# Allegro board PWR_REV00_150306.brd
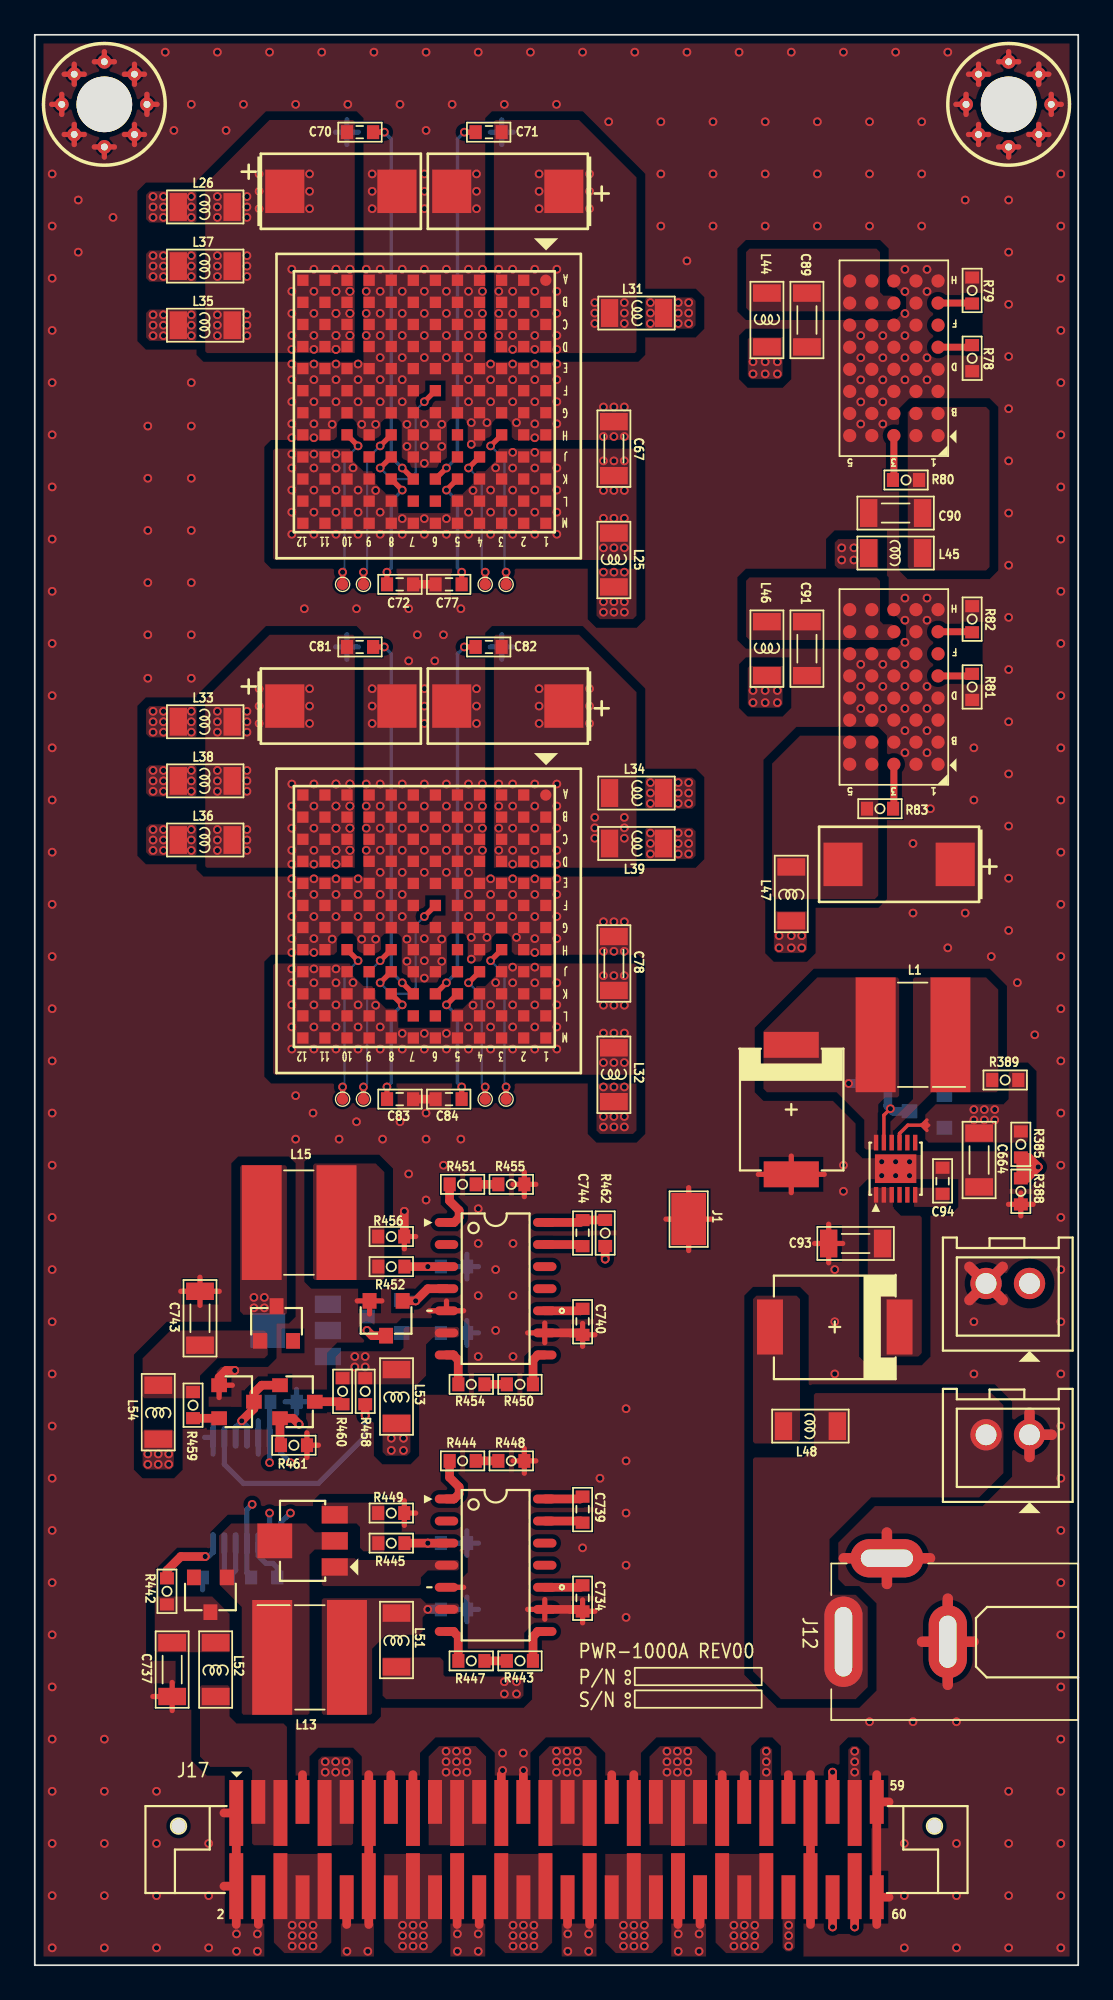
[diagram p0: board, top side]
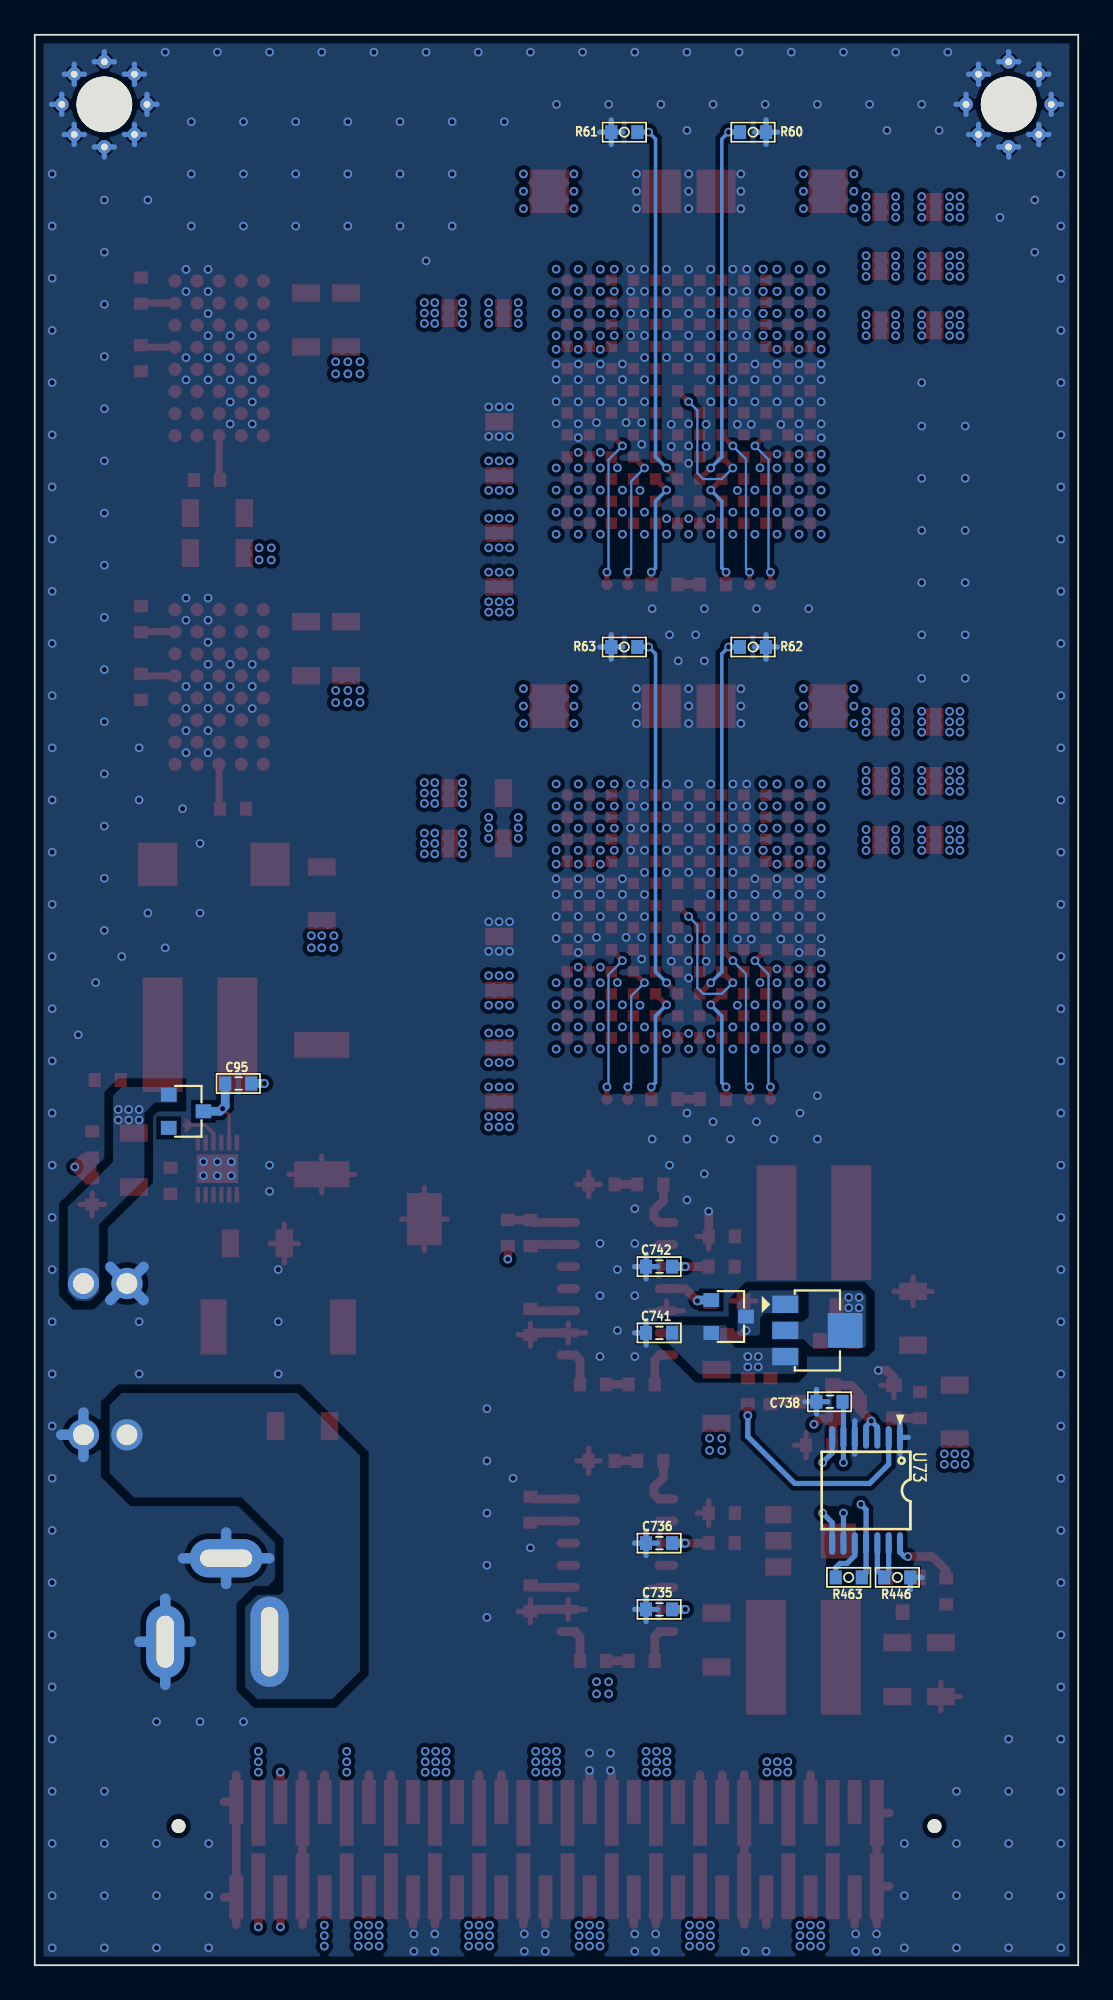
[diagram p1: board, bottom side, seen from below]

Outline 60 x 111 mm; copper layers: TOP, 2-GND, 3-IN, 4-IN, 5-PWR, 6-IN, 7-PWR, 8-IN, 9-IN, 10-PWR, 11-IN, 12-IN, 13-GND, BOTTOM. Coordinates in mm from the lower left corner of the outline.
Outline path: 0,111 0,0 60,0 60,111 0,111

## Placement (name value [footprint] x y rotation side)
C67  10u_1206  [C1206]  33.3 87.2 90 top
C68  47u_Tant_D_6.3V  [TC7343D]  17.6 102 180 top
C69  47u_Tant_D_6.3V  [TC7343D]  27.2 102 0 top
C70  22p_0603  [C0603]  18.7 105.4 0 top
C71  22p_0603  [C0603]  26.1 105.4 180 top
C72  0.1u_0603  [C0603]  21 79.4 0 top
C77  0.1u_0603  [C0603]  23.8 79.4 180 top
C78  10u_1206  [C1206]  33.3 57.6 90 top
C79  47u_Tant_D_6.3V  [TC7343D]  17.6 72.4 180 top
C80  47u_Tant_D_6.3V  [TC7343D]  27.2 72.4 0 top
C81  22p_0603  [C0603]  18.7 75.8 0 top
C82  22p_0603  [C0603]  26.1 75.8 180 top
C83  0.1u_0603  [C0603]  21 49.8 0 top
C84  0.1u_0603  [C0603]  23.8 49.8 180 top
C89  10u_1206  [C1206]  44.4 94.6 270 top
C90  10u_1206  [C1206]  49.5 83.5 180 top
C91  10u_1206  [C1206]  44.4 75.7 270 top
C92  47u_Tant_D_6.3V  [TC7343D]  49.7 63.3 0 top
C93  10u_1206  [C1206]  47.2 41.5 180 top
C94  0.68u_0603  [C0603]  52.2 45.1 90 top
C95  1u_0603  [C0603]  48.3 50.7 0 bottom
C664  10u_1206  [C1206]  54.3 46.3 90 top
C734  0.1u_0603  [C0603]  31.5 21.1 270 top
C735  10u_1206  [C0603]  24.1 20.46 0 bottom
C736  470p_0603  [C0603]  24.1 24.27 0 bottom
C737  2.2u_1206_100V  [C1206]  7.9 17 270 top
C738  0.1u_0603  [C0603]  14.3 32.4 0 bottom
C739  1n_0603  [C0603]  31.5 26.2 270 top
C740  0.1u_0603  [C0603]  31.5 37 270 top
C741  10u_1206  [C0603]  24.1 36.36 0 bottom
C742  470p_0603  [C0603]  24.1 40.17 0 bottom
C743  2.2u_1206_100V  [C1206]  9.5 37.2 90 top
C744  1n_0603  [C0603]  31.5 42.1 270 top
CN2  35312-0260  [SD-35312-2P]  57.2 30.5 270 top
D3  CMSH3-40MA  [SMC]  46 36.7 180 top
D4  CMPSH1-4  [SOT-23]  51.3 49.1 270 bottom
D5  CMSH3-40MA  [SMC]  43.5 49.2 270 top
J1  GND(MOLD)  [TP_3020]  37.6 42.9 270 top
J12  -  [DC-005]  52.5 18.6 270 top
J13  35312-0260  [SD-35312-2P]  57.2 39.2 270 top
J17  FX4B2-60P-1.27SV(Receptacle)  [FX4B2-60S-1_27SV]  30 6.65 180 top
L1  LPS6225-103MR  [IND_LPS6225]  50.5 53.5 0 top
L13  LPS6225-104ML  [IND_LPS6225]  15.8 17.7 180 top
L15  LPS6225-104ML  [IND_LPS6225]  15.2 42.7 0 top
L25  BLM31PG121SN1  [L1206]  33.3 80.8 270 top
L26  BLM31PG121SN1  [L1206]  9.8 101.1 0 top
L31  BLM31PG121SN1  [L1206]  34.6 95 180 top
L32  BLM31PG121SN1  [L1206]  33.3 51.2 270 top
L33  BLM31PG121SN1  [L1206]  9.8 71.5 0 top
L34  BLM31PG121SN1  [L1206]  34.6 67.4 180 top
L35  BLM31PG121SN1  [L1206]  9.8 94.3 0 top
L36  BLM31PG121SN1  [L1206]  9.8 64.7 0 top
L37  BLM31PG121SN1  [L1206]  9.8 97.7 0 top
L38  BLM31PG121SN1  [L1206]  9.8 68.1 0 top
L39  BLM31PG121SN1  [L1206]  34.6 64.5 180 top
L44  BLM31PG121SN1  [L1206]  42.1 94.6 270 top
L45  BLM31PG121SN1  [L1206]  49.5 81.2 0 top
L46  BLM31PG121SN1  [L1206]  42.1 75.7 270 top
L47  BLM31PG121SN1  [L1206]  43.5 61.6 90 top
L48  BLM31PG121SN1  [L1206]  44.6 31 0 top
L51  BLM31PG121SN1  [L1206]  20.8 18.7 90 top
L52  BLM31PG121SN1  [L1206]  10.4 17 90 top
L53  BLM31PG121SN1  [L1206]  20.8 32.7 90 top
L54  BLM31PG121SN1  [L1206]  7.1 31.8 90 top
M1  TP2104K1  [SOT-23]  20.1 37.3 270 bottom
M2  TN2106  [SOT-23]  20.2 37.2 180 top
MH1  HOLE_MOUNT  [SCREW-3_2-NPTH]  4 107 0 top
MH2  HOLE_MOUNT  [SCREW-3_2-NPTH]  56 107 0 top
NOREF  -  []  11.59 8.76 0 top
NOREF#2  -  []  6.37 9.15 0 top
NOREF#3  -  []  47.15 8.76 0 top
NOREF#4  -  []  30 6.65 90 top
NOREF#5  -  []  0 0 90 top
NOREF#6  -  []  48.78 6.44 90 top
NOREF#7  -  []  0 111 0 top
NOREF#8  -  []  48.76 2.65 90 top
NOREF#9  -  []  0 111 0 top
NOREF#10  -  []  6.37 4.15 90 top
NOREF#11  -  []  4 107 90 top
NOREF#12  -  []  56 107 0 top
NOREF#13  -  []  47.51 5.17 90 top
NOREF#14  -  []  8.27 8 0 top
Q1  FMMT494  [SOT-23]  11.6 32.4 270 top
Q2  FMMT551  [SOT-23]  15.1 32.4 270 top
R60  20k_0603  [R0603]  18.7 105.4 180 bottom
R61  43k_0603  [R0603]  26.1 105.4 0 bottom
R62  47k_0603  [R0603]  18.7 75.8 0 bottom
R63  120k_0603  [R0603]  26.1 75.8 0 bottom
R78  0_0603  [R0603]  53.9 92.4 90 top
R79  130k_0603  [R0603]  53.9 96.3 270 top
R80  130k_0603  [R0603]  50.1 85.4 180 top
R81  0_0603  [R0603]  53.9 73.5 90 top
R82  130k_0603  [R0603]  53.9 77.4 270 top
R83  39k_0603  [R0603]  48.6 66.5 0 top
R385  100k_0603  [R0603]  56.7 47.2 270 top
R388  20k_0603  [R0603]  56.7 44.5 270 top
R389  LRC-LR1206-01-R050-F  [R0603]  55.8 50.9 0 top
R442  240k_0603  [R0603]  7.6 21.5 270 top
R443  150k_0603  [R0603]  27.9 17.5 180 top
R444  360k_0603  [R0603]  24.6 29 0 top
R445  1k_0603  [R0603]  20.5 24.27 0 top
R446  15k_0603  [R0603]  10.4 22.3 0 bottom
R447  3.9k_0603  [R0603]  25.1 17.5 0 top
R448  24k_0603  [R0603]  27.4 29 0 top
R449  2.2_0603  [R0603]  20.5 26 180 top
R450  150k_0603  [R0603]  27.9 33.4 180 top
R451  360k_0603  [R0603]  24.6 44.9 0 top
R452  1k_0603  [R0603]  20.5 40.17 0 top
R454  3.9k_0603  [R0603]  25.1 33.4 0 top
R455  24k_0603  [R0603]  27.4 44.9 0 top
R456  2.2_0603  [R0603]  20.5 41.9 180 top
R458  5.1k_0603  [R0603]  19 33 90 top
R459  240k_0603  [R0603]  9.1 32.2 90 top
R460  15k_0603  [R0603]  17.7 33 90 top
R461  15k_0603  [R0603]  14.9 29.9 0 top
R462  10k_0603  [R0603]  32.8 42.1 90 top
R463  1k_0603  [R0603]  13.2 22.3 180 bottom
TP1  TEST POINT  [TP0_65]  17.7 79.4 180 top
TP2  TEST POINT  [TP0_65]  27.1 79.4 180 top
TP3  TEST POINT  [TP0_65]  25.9 79.4 180 top
TP4  TEST POINT  [TP0_65]  18.9 79.4 180 top
TP5  TEST POINT  [TP0_65]  27.1 49.8 180 top
TP6  TEST POINT  [TP0_65]  17.7 49.8 180 top
TP7  TEST POINT  [TP0_65]  25.9 49.8 180 top
TP8  TEST POINT  [TP0_65]  18.9 49.8 180 top
U14  LTM4619EV#PBF  [LGA144_W15X15_P1_27]  22.4 89.9 180 top
U15  LTM4619EV#PBF  [LGA144_W15X15_P1_27]  22.4 60.3 180 top
U18  LTM8045EY#PBF  [BGA40_P1_27_W11_25X6_25]  49.4 92.4 180 top
U19  LTM8045EY#PBF  [BGA40_P1_27_W11_25X6_25]  49.4 73.5 180 top
U20  LT3650EDD-8.2#PBF  [DFN12_3X3_EXP2_38X1_65]  49.5 45.8 0 top
U57  TN2510N8  [TO-243AA-4P]  15.4 24.4 90 top
U58  MMBD914LT1G  [SOT-23]  10.1 21.3 180 top
U59  TP2510N8  [TO-243AA-4P]  15 36.5 270 bottom
U60  MMBD914LT1G  [SOT-23]  13.9 36.9 0 top
U72  HV9110NG  [SOIC14_P1-27_W6_0X8_65]  26.5 23 0 top
U73  AD5207BRU100  [TSSOP14_P0_65_W5_1X6_6]  12.2 27.3 0 bottom
U74  HV9110NG  [SOIC14_P1-27_W6_0X8_65]  26.5 38.9 0 top

## Library data of the parts
C67 C70-C72 C77 C78 C81-C84 C89-C91 C93-C95 C664 C734-C744 = CAP NP
C68 C69 C79 C80 C92 = C
CN2 = CON2
D3 D5 = MMBZ5243BL_0
D4 = CMPSH1-4
J1 = CON1_0
J12 = DC-005_0
J13 = CON10_1
J17 = CONN PCB 30x2
L1 L13 L15 = INDUCTOR
L25 L26 L31-L39 L44-L48 L51-L54 = BEAD FERRITE
M1 = TP2104_0
M2 = TN2106
MH1 MH2 = MOUNT HOLE
Q1 = MMBT3904_0
Q2 = Q2SA1013_0
R60-R63 R78-R83 R385 R388 R389 R442-R452 R454-R456 R458-R463 = R
TP1-TP8 = TEST POINT
U14 U15 = SN75240_70
U18 U19 = SN75240_67
U20 = SN75240_80
U57 U59 = 7414_87
U58 U60 = 7414_88
U72 = SN75240_63
U73 = SN75240_81
U74 = SN75240_65

## Footprints (pads in the part's own frame, mm; a bottom-side part is the same pattern mirrored in y, then rotated)
BGA40_P1_27_W11_25X6_25
  round 0.76 smd: A1(-2.54,4.445) A2(-1.27,4.445) A3(0,4.445) A4(1.27,4.445) A5(2.54,4.445) B1(-2.54,3.175) B2(-1.27,3.175) B3(0,3.175) B4(1.27,3.175) B5(2.54,3.175) C1(-2.54,1.905) C2(-1.27,1.905) C3(0,1.905) C4(1.27,1.905) C5(2.54,1.905) D1(-2.54,0.635) D2(-1.27,0.635) D3(0,0.635) D4(1.27,0.635) D5(2.54,0.635) E1(-2.54,-0.635) E2(-1.27,-0.635) E3(0,-0.635) E4(1.27,-0.635) E5(2.54,-0.635) F1(-2.54,-1.905) F2(-1.27,-1.905) F3(0,-1.905) F4(1.27,-1.905) F5(2.54,-1.905) G1(-2.54,-3.175) G2(-1.27,-3.175) G3(0,-3.175) G4(1.27,-3.175) G5(2.54,-3.175) H1(-2.54,-4.445) H2(-1.27,-4.445) H3(0,-4.445) H4(1.27,-4.445) H5(2.54,-4.445)
C0603
  rect 0.7x0.8 smd: 1(-0.75,0) 2(0.75,0)
C1206
  rect 1x1.6 smd: 1(-1.55,0) 2(1.55,0)
DC-005
  oval 2.2x4.2 hole 1x3: 2(-4.8,-3.5)
  oval 4.2x2.2 hole 3x1: 3(0,0)
  oval 5.2x2.2 hole 4x1: 4(0,-6)
DFN12_3X3_EXP2_38X1_65
  rect 0.25x0.9 smd: 1(-1.125,-1.5) 2(-0.675,-1.5) 3(-0.225,-1.5) 4(0.225,-1.5) 5(0.675,-1.5) 6(1.125,-1.5) 7(1.125,1.5) 8(0.675,1.5) 9(0.225,1.5) 10(-0.225,1.5) 11(-0.675,1.5) 12(-1.125,1.5)
  rect 2.38x1.65 smd: 13(0,0)
FX4B2-60S-1_27SV
  round 0.8 hole 0.8 unplated: (-21.735,-1.35) (21.735,-1.35)
  rect 0.8x3.79 smd: 1(18.415,-2.105) 2(18.415,2.105) 5(15.875,-2.105) 6(15.875,2.105) 9(13.335,-2.105) 10(13.335,2.105) 13(10.795,-2.105) 14(10.795,2.105) 17(8.255,-2.105) 18(8.255,2.105) 21(5.715,-2.105) 22(5.715,2.105) 25(3.175,-2.105) 26(3.175,2.105) 29(0.635,-2.105) 30(0.635,2.105) 33(-1.905,-2.105) 34(-1.905,2.105) 37(-4.445,-2.105) 38(-4.445,2.105) 41(-6.985,-2.105) 42(-6.985,2.105) 45(-9.525,-2.105) 46(-9.525,2.105) 49(-12.065,-2.105) 50(-12.065,2.105) 53(-14.605,-2.105) 54(-14.605,2.105) 57(-17.145,-2.105) 58(-17.145,2.105)
  rect 0.8x2.52 smd: 3(17.145,-2.74) 4(17.145,2.74) 7(14.605,-2.74) 8(14.605,2.74) 11(12.065,-2.74) 12(12.065,2.74) 15(9.525,-2.74) 16(9.525,2.74) 19(6.985,-2.74) 20(6.985,2.74) 23(4.445,-2.74) 24(4.445,2.74) 27(1.905,-2.74) 28(1.905,2.74) 31(-0.635,-2.74) 32(-0.635,2.74) 35(-3.175,-2.74) 36(-3.175,2.74) 39(-5.715,-2.74) 40(-5.715,2.74) 43(-8.255,-2.74) 44(-8.255,2.74) 47(-10.795,-2.74) 48(-10.795,2.74) 51(-13.335,-2.74) 52(-13.335,2.74) 55(-15.875,-2.74) 56(-15.875,2.74) 59(-18.415,-2.74) 60(-18.415,2.74)
IND_LPS6225
  rect 2.3x6.6 smd: 1(-2.15,0) 2(2.15,0)
L1206
  rect 1x1.6 smd: 1(-1.55,0) 2(1.55,0)
LGA144_W15X15_P1_27
  round 0.65 smd: A1(-6.985,-6.985)
  rect 0.65x0.65 smd: A2(-5.715,-6.985) A3(-4.445,-6.985) A4(-3.175,-6.985) A5(-1.905,-6.985) A6(-0.635,-6.985) A7(0.635,-6.985) A8(1.905,-6.985) A9(3.175,-6.985) A10(4.445,-6.985) A11(5.715,-6.985) A12(6.985,-6.985) B1(-6.985,-5.715) B2(-5.715,-5.715) B3(-4.445,-5.715) B4(-3.175,-5.715) B5(-1.905,-5.715) B6(-0.635,-5.715) B7(0.635,-5.715) B8(1.905,-5.715) B9(3.175,-5.715) B10(4.445,-5.715) B11(5.715,-5.715) B12(6.985,-5.715) C1(-6.985,-4.445) C2(-5.715,-4.445) C3(-4.445,-4.445) C4(-3.175,-4.445) C5(-1.905,-4.445) C6(-0.635,-4.445) C7(0.635,-4.445) C8(1.905,-4.445) C9(3.175,-4.445) C10(4.445,-4.445) C11(5.715,-4.445) C12(6.985,-4.445) D1(-6.985,-3.175) D2(-5.715,-3.175) D3(-4.445,-3.175) D4(-3.175,-3.175) D5(-1.905,-3.175) D6(-0.635,-3.175) D7(0.635,-3.175) D8(1.905,-3.175) D9(3.175,-3.175) D10(4.445,-3.175) D11(5.715,-3.175) D12(6.985,-3.175) E1(-6.985,-1.905) E2(-5.715,-1.905) E3(-4.445,-1.905) E4(-3.175,-1.905) E5(-1.905,-1.905) E6(-0.635,-1.905) E7(0.635,-1.905) E8(1.905,-1.905) E9(3.175,-1.905) E10(4.445,-1.905) E11(5.715,-1.905) E12(6.985,-1.905) F1(-6.985,-0.635) F2(-5.715,-0.635) F3(-4.445,-0.635) F4(-3.175,-0.635) F5(-1.905,-0.635) F6(-0.635,-0.635) F7(0.635,-0.635) F8(1.905,-0.635) F9(3.175,-0.635) F10(4.445,-0.635) F11(5.715,-0.635) F12(6.985,-0.635) G1(-6.985,0.635) G2(-5.715,0.635) G3(-4.445,0.635) G4(-3.175,0.635) G5(-1.905,0.635) G6(-0.635,0.635) G7(0.635,0.635) G8(1.905,0.635) G9(3.175,0.635) G10(4.445,0.635) G11(5.715,0.635) G12(6.985,0.635) H1(-6.985,1.905) H2(-5.715,1.905) H3(-4.445,1.905) H4(-3.175,1.905) H5(-1.905,1.905) H6(-0.635,1.905) H7(0.635,1.905) H8(1.905,1.905) H9(3.175,1.905) H10(4.445,1.905) H11(5.715,1.905) H12(6.985,1.905) J1(-6.985,3.175) J2(-5.715,3.175) J3(-4.445,3.175) J4(-3.175,3.175) J5(-1.905,3.175) J6(-0.635,3.175) J7(0.635,3.175) J8(1.905,3.175) J9(3.175,3.175) J10(4.445,3.175) J11(5.715,3.175) J12(6.985,3.175) K1(-6.985,4.445) K2(-5.715,4.445) K3(-4.445,4.445) K4(-3.175,4.445) K5(-1.905,4.445) K6(-0.635,4.445) K7(0.635,4.445) K8(1.905,4.445) K9(3.175,4.445) K10(4.445,4.445) K11(5.715,4.445) K12(6.985,4.445) L1(-6.985,5.715) L2(-5.715,5.715) L3(-4.445,5.715) L4(-3.175,5.715) L5(-1.905,5.715) L6(-0.635,5.715) L7(0.635,5.715) L8(1.905,5.715) L9(3.175,5.715) L10(4.445,5.715) L11(5.715,5.715) L12(6.985,5.715) M1(-6.985,6.985) M2(-5.715,6.985) M3(-4.445,6.985) M4(-3.175,6.985) M5(-1.905,6.985) M6(-0.635,6.985) M7(0.635,6.985) M8(1.905,6.985) M9(3.175,6.985) M10(4.445,6.985) M11(5.715,6.985) M12(6.985,6.985)
R0603
  rect 0.7x0.8 smd: 1(-0.75,0) 2(0.75,0)
SCREW-3_2-NPTH
  round 3.2 hole 3.2 unplated: (0,0)
  round 0.8 hole 0.4: 1(0,2.45) 2(1.732,1.732) 3(2.45,0) 4(1.732,-1.732) 5(0,-2.45) 6(-1.732,-1.732) 7(-2.45,0) 8(-1.732,1.732)
SD-35312-2P
  round 1.8 hole 1.2: 1(0,0) 2(0,-2.5)
SMC
  rect 1.49x3.17 smd: 1(3.724,0) 2(-3.724,0)
SOIC14_P1-27_W6_0X8_65
  oval 1.35x0.51 smd: 1(-2.825,3.81) 2(-2.825,2.54) 3(-2.825,1.27) 4(-2.825,0) 5(-2.825,-1.27) 6(-2.825,-2.54) 7(-2.825,-3.81) 8(2.825,-3.81) 9(2.825,-2.54) 10(2.825,-1.27) 11(2.825,0) 12(2.825,1.27) 13(2.825,2.54) 14(2.825,3.81)
SOT-23
  rect 0.8x0.9 smd: 1(-0.95,-1) 2(0.95,-1) 3(0,1)
TC7343D
  rect 2.25x2.5 smd: 1(3.225,0) 2(-3.225,0)
TO-243AA-4P
  rect 1x1.5 smd: 1(-1.501,-1.849) 2(0,-1.849) 3(1.501,-1.849)
  rect 2x2 smd: 4(0,1.6)
TP0_65
  round 0.65 smd: 1(0,0)
TP_3020
  rect 3x2 smd: 1(0,0)
TSSOP14_P0_65_W5_1X6_6
  oval 0.35x1.3 smd: 1(-1.95,-3.05) 2(-1.3,-3.05) 3(-0.65,-3.05) 4(0,-3.05) 5(0.65,-3.05) 6(1.3,-3.05) 7(1.95,-3.05) 8(1.95,3.05) 9(1.3,3.05) 10(0.65,3.05) 11(0,3.05) 12(-0.65,3.05) 13(-1.3,3.05) 14(-1.95,3.05)

## Nets
GND_SIGNAL: C67.2 C68.2 C69.2 C72.2 C77.2 C78.2 C79.2 C80.2 C83.2 C84.2 C89.2 C90.2 C91.2 C92.1 C93.2 C94.2 C664.1 C734.2 C735.2 C736.2 C737.2 C738.2 C740.2 C741.2 C742.2 C743.2 CN2.1 D5.1(A) J1.1 J12.2 J12.3 J13.2 J17.1 J17.2 J17.4 J17.7 J17.12 J17.13 J17.14 J17.15 J17.17 J17.22 J17.24 J17.25 J17.27 J17.32 J17.34 J17.35 J17.37 J17.42 J17.44 J17.45 J17.47 J17.51 J17.53 J17.54 J17.59 J17.60 M2.2(S) MH1.1($PIN0) MH1.2($PIN1) MH1.3($PIN2) MH1.4($PIN3) MH1.5($PIN7) MH1.6($PIN6) MH1.7($PIN5) MH1.8($PIN4) MH2.1($PIN0) MH2.2($PIN1) MH2.3($PIN2) MH2.4($PIN3) MH2.5($PIN7) MH2.6($PIN6) MH2.7($PIN5) MH2.8($PIN4) Q1.1(B) R60.2 R61.2 R62.1 R63.2 R78.1 R79.1 R81.1 R82.1 R388.2 R446.1 R448.2 R449.1 R455.2 R456.1 R461.2 U14.A4(PGND1) U14.A5(PGND2) U14.A6(PGND3) U14.A7(PGND4) U14.A8(PGND5) U14.A9(PGND6) U14.B4(PGND7) U14.B5(PGND8) U14.B6(PGND9) U14.B7(PGND10) U14.B8(PGND11) U14.B9(PGND12) U14.C4(PGND13) U14.C5(PGND14) U14.C6(PGND15) U14.C7(PGND16) U14.C8(PGND17) U14.C9(PGND18) U14.D4(PGND19) U14.D5(PGND20) U14.D6(PGND21) U14.D7(PGND22) U14.D8(PGND23) U14.D9(PGND24) U14.E1(PGND25) U14.E2(PGND26) U14.E3(PGND27) U14.E4(PGND28) U14.E5(PGND29) U14.E6(PGND30) U14.E7(PGND31) U14.E8(PGND32) U14.E9(PGND33) U14.E10(PGND34) U14.E11(PGND35) U14.E12(PGND36) U14.F1(PGND37) U14.F2(PGND38) U14.F3(PGND39) U14.F4(PGND40) U14.F5(PGND41) U14.F7(PGND42) U14.F8(PGND43) U14.F9(PGND44) U14.F10(PGND45) U14.F11(PGND46) U14.F12(PGND47) U14.G1(PGND48) U14.G2(PGND49) U14.G3(PGND50) U14.G4(PGND51) U14.G5(PGND52) U14.G6(PGND53) U14.G7(PGND54) U14.G8(PGND55) U14.G9(PGND56) U14.G10(PGND57) U14.G11(PGND58) U14.G12(PGND59) U14.H1(PGND60) U14.H2(PGND61) U14.H4(PGND62) U14.H6(SGND1) U14.H7(SGND2) U14.H9(PGND63) U14.H11(PGND64) U14.H12(PGND65) U14.J6(SGND3) U14.J7(SGND4) U15.A4(PGND1) U15.A5(PGND2) U15.A6(PGND3) U15.A7(PGND4) U15.A8(PGND5) U15.A9(PGND6) U15.B4(PGND7) U15.B5(PGND8) U15.B6(PGND9) U15.B7(PGND10) U15.B8(PGND11) U15.B9(PGND12) U15.C4(PGND13) U15.C5(PGND14) U15.C6(PGND15) U15.C7(PGND16) U15.C8(PGND17) U15.C9(PGND18) U15.D4(PGND19) U15.D5(PGND20) U15.D6(PGND21) U15.D7(PGND22) U15.D8(PGND23) U15.D9(PGND24) U15.E1(PGND25) U15.E2(PGND26) U15.E3(PGND27) U15.E4(PGND28) U15.E5(PGND29) U15.E6(PGND30) U15.E7(PGND31) U15.E8(PGND32) U15.E9(PGND33) U15.E10(PGND34) U15.E11(PGND35) U15.E12(PGND36) U15.F1(PGND37) U15.F2(PGND38) U15.F3(PGND39) U15.F4(PGND40) U15.F5(PGND41) U15.F7(PGND42) U15.F8(PGND43) U15.F9(PGND44) U15.F10(PGND45) U15.F11(PGND46) U15.F12(PGND47) U15.G1(PGND48) U15.G2(PGND49) U15.G3(PGND50) U15.G4(PGND51) U15.G5(PGND52) U15.G6(PGND53) U15.G7(PGND54) U15.G8(PGND55) U15.G9(PGND56) U15.G10(PGND57) U15.G11(PGND58) U15.G12(PGND59) U15.H1(PGND60) U15.H2(PGND61) U15.H4(PGND62) U15.H6(SGND1) U15.H7(SGND2) U15.H9(PGND63) U15.H11(PGND64) U15.H12(PGND65) U15.J6(SGND3) U15.J7(SGND4) U18.A4(VOUT-1) U18.A5(VOUT-2) U18.B3(GND5) U18.B4(VOUT-3) U18.B5(VOUT-4) U18.C1(GND10) U18.C2(GND11) U18.C3(GND12) U18.C4(GND13) U18.C5(GND14) U18.D1(GND16) U18.D2(GND17) U18.D3(GND18) U18.D4(GND19) U18.D5(GND20) U18.E2(GND1) U18.E3(GND2) U18.E4(GND3) U18.E5(GND4) U18.F2(GND6) U18.F3(GND7) U18.F4(GND8) U18.F5(GND9) U18.G2(GND15) U18.H1(GND21) U18.H2(GND22) U18.H3(GND23) U19.A1(VOUT+1) U19.A2(VOUT+2) U19.B1(VOUT+3) U19.B2(VOUT+4) U19.B3(GND5) U19.C1(GND10) U19.C2(GND11) U19.C3(GND12) U19.C4(GND13) U19.C5(GND14) U19.D1(GND16) U19.D2(GND17) U19.D3(GND18) U19.D4(GND19) U19.D5(GND20) U19.E2(GND1) U19.E3(GND2) U19.E4(GND3) U19.E5(GND4) U19.F2(GND6) U19.F3(GND7) U19.F4(GND8) U19.F5(GND9) U19.G2(GND15) U19.H1(GND21) U19.H2(GND22) U19.H3(GND23) U20.13(EXP) U72.5(-VIN) U72.9(DISCHARGE) U73.1(VSS) U73.5(DGND) U74.5(-VIN) U74.9(DISCHARGE)
+A1P8: J17.39 J17.41 J17.43 L33.1
+A1P9: J17.29 J17.31 J17.33 L31.1
+A3P3: C738.1 J17.19 J17.21 J17.23 L26.1 R463.2 U73.6(S\H\D\N\) U73.11(VDD)
+A12P: L45.1 L51.1 L53.1
+D1P2: J17.52 L34.1
+D1P2_FPGA: J17.46 J17.48 J17.50 L39.1
+D1P8: J17.36 J17.38 J17.40 L36.1
+D1P8_FPGA: J17.26 J17.28 J17.30 L38.1
+D3P3: J17.16 J17.18 J17.20 L35.1
+D3P3_FPGA: J17.6 J17.8 J17.10 L37.1
-A3P3: J17.49 L47.1
BATT_+A7P4: C664.2 D4.1(A) J13.1 L25.2 L32.2 L44.2 L46.2 R385.1 R389.2 U20.9(BAT)
BATT_LEVEL: J17.57 R385.2 R388.1
EXT+12V: CN2.2 J12.4 L48.2
HPC: C739.1 U72.14(FB)
HPFB: Q2.2(E) R461.1 R462.1
HVN_VAR: J17.9 J17.11 L54.1
HVP_VAR: J17.3 J17.5 L52.1
PM_A1: R442.1 U73.14(B1)
PM_A2: R458.1 U73.2(B2)
PM_B1: R446.2 U73.12(W1) U73.13(A1)
PM_B2: Q1.3(C) Q2.1(B) U73.3(A2) U73.4(W2)
PM_CLK: J17.55 U73.9(CLK)
PM_CS: J17.56 U73.7(C\S\)
PM_SDI: J17.58 U73.8(SDI)
N16801980: C735.1 L13.1 L51.2 U72.6(VDD)
N16801995: R443.1 U72.8(OSC IN)
N16801998: R443.2 R447.2
N16802036: R444.1 U72.1(BIAS)
N16802052: C734.1 U72.10(VREF)
N16802649: R445.1 R449.2 U57.3(S)
N16802652: U57.1(G) U72.4(OUTPUT)
N16802759: L13.2 U57.2(D1) U57.4(D2) U58.1(A)
N16802946: R447.1 U72.7(OSC OUT)
N16803110: R444.2 R448.1
N16805912: R450.1 U74.8(OSC IN)
N16805914: R450.2 R454.2
N16805918: R451.1 U74.1(BIAS)
N16805928: C740.1 U74.10(VREF)
N16805964: C741.1 L53.2 M1.2(S) R458.2 R460.2 U59.3(S) U74.6(VDD)
N16805994: L15.2 R452.1 R456.2
N16806049: R454.1 U74.7(OSC OUT)
N16806059: R451.2 R455.1
N16807604: C739.2 U72.13(COMP)
N16807701: C744.1 R462.2 U74.14(FB)
N16807711: C744.2 U74.13(COMP)
N16807961: C736.1 R445.2 U72.3(SENSE)
N16808575: C742.1 R452.2 U74.3(SENSE)
N16808930: M1.1(G) M2.1(G) U74.4(OUTPUT)
N16809022: M1.3(D) M2.3(D) U59.1(G)
N16809213: L15.1 U59.2(D1) U59.4(D2) U60.3(C)
N16810100: Q1.2(E) R459.1
N16810105: C743.1 L54.2 R459.2 U60.1(A)
N16810522: Q2.3(C) R460.1
N16841635: C67.1 L25.1 U14.J1(VIN1) U14.J2(VIN2) U14.J3(VIN3) U14.J10(VIN4) U14.J11(VIN5) U14.J12(VIN6) U14.K1(VIN7) U14.K2(VIN8) U14.K3(VIN9) U14.K4(VIN10) U14.K9(VIN11) U14.K10(VIN12) U14.K11(VIN13) U14.K12(VIN14) U14.L1(VIN15) U14.L2(VIN16) U14.L3(VIN17) U14.L4(VIN18) U14.L5(VIN19) U14.L8(VIN20) U14.L9(VIN21) U14.L10(VIN22) U14.L11(VIN23) U14.L12(VIN24) U14.M1(VIN25) U14.M2(VIN26) U14.M3(VIN27) U14.M4(VIN28) U14.M5(VIN29) U14.M6(VIN30) U14.M7(VIN31) U14.M8(VIN32) U14.M9(VIN33) U14.M10(VIN34) U14.M11(VIN35) U14.M12(VIN36)
N16842686: C68.1 C70.1 L26.2 L35.2 L37.2 U14.A10(VOUT1-1) U14.A11(VOUT1-2) U14.A12(VOUT1-3) U14.B10(VOUT1-4) U14.B11(VOUT1-5) U14.B12(VOUT1-6) U14.C10(VOUT1-7) U14.C11(VOUT1-8) U14.C12(VOUT1-9) U14.D10(VOUT1-10) U14.D11(VOUT1-11) U14.D12(VOUT1-12)
N16847545: C69.1 C71.1 L31.2 U14.A1(VOUT2-1) U14.A2(VOUT2-2) U14.A3(VOUT2-3) U14.B1(VOUT2-4) U14.B2(VOUT2-5) U14.B3(VOUT2-6) U14.C1(VOUT2-7) U14.C2(VOUT2-8) U14.C3(VOUT2-9) U14.D1(VOUT2-10) U14.D2(VOUT2-11) U14.D3(VOUT2-12)
N16847845: C70.2 R60.1 U14.K7(VFB1)
N16849687: C71.2 R61.1 U14.K6(VFB2)
N16851516: TP1.1 U14.H10(SW1)
N16851519: TP2.1 U14.H3(SW2)
N16851598: U14.F6(INTVCC) U14.J8(FREQ)
N16851915: TP3.1 U14.J4(EXTVCC)
N16851929: TP4.1 U14.H8(MODE/PLLIN)
N16851988: C72.1 U14.K8(TK/SS1)
N16851993: C77.1 U14.K5(TK/SS2)
N16854474: C78.1 L32.1 U15.J1(VIN1) U15.J2(VIN2) U15.J3(VIN3) U15.J10(VIN4) U15.J11(VIN5) U15.J12(VIN6) U15.K1(VIN7) U15.K2(VIN8) U15.K3(VIN9) U15.K4(VIN10) U15.K9(VIN11) U15.K10(VIN12) U15.K11(VIN13) U15.K12(VIN14) U15.L1(VIN15) U15.L2(VIN16) U15.L3(VIN17) U15.L4(VIN18) U15.L5(VIN19) U15.L8(VIN20) U15.L9(VIN21) U15.L10(VIN22) U15.L11(VIN23) U15.L12(VIN24) U15.M1(VIN25) U15.M2(VIN26) U15.M3(VIN27) U15.M4(VIN28) U15.M5(VIN29) U15.M6(VIN30) U15.M7(VIN31) U15.M8(VIN32) U15.M9(VIN33) U15.M10(VIN34) U15.M11(VIN35) U15.M12(VIN36)
N16854644: C79.1 C81.1 L33.2 L36.2 L38.2 U15.A10(VOUT1-1) U15.A11(VOUT1-2) U15.A12(VOUT1-3) U15.B10(VOUT1-4) U15.B11(VOUT1-5) U15.B12(VOUT1-6) U15.C10(VOUT1-7) U15.C11(VOUT1-8) U15.C12(VOUT1-9) U15.D10(VOUT1-10) U15.D11(VOUT1-11) U15.D12(VOUT1-12)
N16855008: C80.1 C82.1 L34.2 L39.2 U15.A1(VOUT2-1) U15.A2(VOUT2-2) U15.A3(VOUT2-3) U15.B1(VOUT2-4) U15.B2(VOUT2-5) U15.B3(VOUT2-6) U15.C1(VOUT2-7) U15.C2(VOUT2-8) U15.C3(VOUT2-9) U15.D1(VOUT2-10) U15.D2(VOUT2-11) U15.D3(VOUT2-12)
N16855112: C81.2 R62.2 U15.K7(VFB1)
N16855128: C82.2 R63.1 U15.K6(VFB2)
N16855306: TP6.1 U15.H10(SW1)
N16855308: TP5.1 U15.H3(SW2)
N16855324: U15.F6(INTVCC) U15.J8(FREQ)
N16855330: TP7.1 U15.J4(EXTVCC)
N16855339: TP8.1 U15.H8(MODE/PLLIN)
N16855356: C83.1 U15.K8(TK/SS1)
N16855360: C84.1 U15.K5(TK/SS2)
N16913634: C737.1 L52.2 R442.2 U58.3(C)
N16915433: C89.1 L44.1 U18.G3(RUN) U18.G4(VIN1) U18.G5(VIN2) U18.H4(VIN3) U18.H5(VIN4)
N16915625: R78.2 U18.E1(SYNC)
N16915631: R79.2 U18.G1(RT)
N16915637: C90.1 L45.2 R80.1 U18.A1(VOUT+1) U18.A2(VOUT+2) U18.B1(VOUT+3) U18.B2(VOUT+4)
N16915703: R80.2 U18.A3(FB)
N16915723: C92.2 L47.2 R83.1 U19.A4(VOUT-1) U19.A5(VOUT-2) U19.B4(VOUT-3) U19.B5(VOUT-4)
N16915733: C91.1 L46.1 U19.G3(RUN) U19.G4(VIN1) U19.G5(VIN2) U19.H4(VIN3) U19.H5(VIN4)
N16915931: R81.2 U19.E1(SYNC)
N16915937: R82.2 U19.G1(RT)
N16915989: R83.2 U19.A3(FB)
N16918606: C93.1 D3.2(C) U20.1(VIN) U20.2(CLP) U20.3(S\H\D\N\)
N16919071: D3.1(A) L48.1
N16920496: C94.1 U20.6(TIMER)
N16920501: C95.1 D5.2(C) L1.1 U20.12(SW)
N16920506: C95.2 D4.3(C) U20.11(BOOST)
N16920812: L1.2 R389.1 U20.10(SENSE)
N16993267: R463.1 U73.10(R\S\)

Pads without a net: D4 2; U14 H5 J5 J9 L6 L7; U15 H5 J5 J9 L6 L7; U18 F1; U19 F1; U20 4 5 7 8; U58 2; U60 2; U72 2 11 12; U74 2 11 12

## Via types
v1: diameter 0.5, hole 0.3, TOP to BOTTOM, 1077 vias

## Routing (per net, layer and track width the routed paths; a pad name or vN(x,y) marks a point on that pad's centre or on a via; arc(x,y) is an arc through that point)
GND_SIGNAL: length 425.6
  TOP w0.3: C740.2 31.5,36.9 ; C740.2 32.21,36.25 ; C740.2 30.79,36.25 ; C740.2 31.5,35.59 ; 22.69,37.63 U74.5 ; U74.5 24.66,37.63 ; U74.5 23.68,38.19 ; MH2.3 59.03,107 ; MH2.3 58.45,107.58 ; MH2.3 58.45,106.42 ; C93.2 45.65,42.61 ; C93.2 45.65,40.39 ; C93.2 46.46,41.5 ; C93.2 44.84,41.5 ; 31.5,19.69 C734.2 ; C734.2 32.21,20.35 ; C734.2 31.5,21 ; C734.2 30.79,20.35 ; MH2.4 58.31,105.27 ; MH2.4 57.15,105.27 ; MH2.4 57.73,104.69 ; MH2.4 57.73,105.85 ; 5.15,108.73 MH1.2 ; MH1.2 5.73,108.15 ; MH1.2 6.31,108.73 ; MH1.2 5.73,109.31 ; 1.69,108.73 MH1.8 ; MH1.8 2.27,108.15 ; MH1.8 2.85,108.73 ; MH1.8 2.27,109.31 ; C743.2 10.61,38.75 ; C743.2 9.5,37.94 ; C743.2 8.39,38.75 ; C743.2 9.5,39.56 ; R449.1 21.9,26 ; R449.1 21.25,26.71 ; R449.1 21.25,25.29 ; 4,103.97 MH1.5 ; MH1.5 4.58,104.55 ; MH1.5 3.42,104.55 ; MH2.7 53.55,107.58 ; MH2.7 52.97,107 ; MH2.7 53.55,106.42 ; 6.45,106.42 MH1.3 ; MH1.3 6.45,107.58 ; MH1.3 7.03,107 ; MH2.5 56.58,104.55 ; MH2.5 56,103.97 ; MH2.5 55.42,104.55 ; 21.25,41.19 R456.1 21.9,41.9 ; 0.97,107 MH1.7 ; MH1.7 1.55,107.58 ; MH1.7 1.55,106.42 ; 7.9,14.64 C737.2 ; C737.2 7.9,16.26 ; C737.2 6.79,15.45 ; 1.69,105.27 MH1.6 ; MH1.6 2.27,104.69 ; MH1.6 2.85,105.27 ; MH1.6 2.27,105.85 ; U72.5 24.66,21.73 ; MH2.2 57.73,109.31 ; MH2.2 57.15,108.73 ; MH2.2 58.31,108.73 ; MH2.2 57.73,108.15 ; MH1.1 4,110.03 ; MH1.1 3.42,109.45 ; MH1.1 4.58,109.45 ; R448.2 28.81,29 ; R448.2 28.15,29.71 ; R448.2 27.5,29 ; R448.2 28.15,28.29 ; 27.5,44.9 R455.2 ; R455.2 28.15,45.61 ; R455.2 28.81,44.9 ; R455.2 28.15,44.19 ; 28.34,36.36 U74.9 ; U74.9 29.32,36.92 ; U74.9 29.32,35.8 ; J1.1 37.6,44.71 ; J1.1 37.6,41.09 ; J1.1 36.29,42.9 ; J1.1 38.91,42.9 ; M2.2 19.96,38.2 ; M2.2 19.25,37.44 ; M2.2 18.54,38.2 ; D5.1 43.5,46.53 ; D5.1 45.39,45.48 ; D5.1 41.61,45.48 ; D5.1 43.5,44.42 ; MH2.6 54.85,105.27 ; MH2.6 54.27,104.69 ; MH2.6 53.69,105.27 ; MH2.6 54.27,105.85 ; 5.73,104.69 MH1.4 ; MH1.4 6.31,105.27 ; MH1.4 5.15,105.27 ; MH1.4 5.73,105.85 ; 54.27,108.15 MH2.8 ; MH2.8 53.69,108.73 ; MH2.8 54.27,109.31 ; MH2.8 54.85,108.73 ; R461.2 16.31,29.9 ; R461.2 15.65,30.61 ; R461.2 15.65,29.19 ; 55.99,43.75 R388.2 ; R388.2 56.7,44.4 ; R388.2 56.7,43.09 ; R388.2 57.41,43.75 ; 10.6,32.64 Q1.1 11.36,33.35 ; 29.32,19.9 U72.9 ; U72.9 29.32,21.02 ; U72.9 28.34,20.46 ; MH2.1 56,110.03 ; MH2.1 55.42,109.45 ; MH2.1 56.58,109.45
  TOP w0.5: 11.59,2.34 11.59,4.54 ; 11.59,4.54 J17.1 10.88,8.76 ; 11.59,4.54 10.88,4.54 ; 25.55,2.34 J17.24 ; 34.45,8.76 34.45,10.96 ; 48.41,2.34 J17.60 ; J17.60 J17.59 ; J17.60 49.12,3.91 ; 19.2,2.34 J17.13 19.2,10.96 ; 36.98,2.34 J17.42 ; J17.25 26.82,10.96 ; v1(11.5,34.2) 11,34.2 10.6,33.8 Q1.1 ; J17.7 15.39,10.96 ; 30.64,2.34 J17.32 ; 44.6,10.96 44.6,2.34 ; C734.2 31.39,20.46 U72.9 ; J17.51 43.34,10.96 ; R456.1 v1(21.25,43.35) ; J17.27 28.09,10.96 ; 12.86,2.34 J17.4 ; 17.93,2.34 J17.12 ; 24.29,2.34 24.29,4.54 ; J17.59 48.41,10.96 ; J17.59 49.12,9.39 ; C740.2 31.39,36.36 U74.9 ; J17.35 33.17,10.96 ; C84.2 C83.2 ; J17.15 20.48,10.96 ; J17.17 21.75,10.96 ; J17.47 40.8,10.96 ; 39.52,8.76 39.52,10.96 ; 31.91,2.34 J17.34 ; C77.2 C72.2 ; 38.26,2.34 J17.44
  TOP w0.6: 53.75,40.15 J13.2 ; J13.2 55.65,38.25 ; J13.2 53.75,38.25 ; J13.2 55.65,40.15 ; 49,21.92 J12.2 ; J12.2 46.52,23.4 ; J12.2 51.48,23.4 ; J12.2 49,24.88 ; CN2.1 57.2,31.78 ; CN2.1 57.2,29.22 ; CN2.1 58.48,30.5 ; J12.3 52.5,21.08 ; J12.3 52.5,16.12 ; J12.3 53.98,18.6 ; J12.3 51.02,18.6
  2-GND w0.6: 52.5,16.12 J12.3 ; J12.3 53.98,18.6 ; J12.3 52.5,21.08 ; J12.3 51.02,18.6 ; 49,21.92 J12.2 ; J12.2 49,24.88 ; J12.2 51.48,23.4 ; J12.2 46.52,23.4 ; 53.75,40.15 J13.2 ; J13.2 53.75,38.25 ; J13.2 55.65,40.15 ; J13.2 55.65,38.25 ; 57.2,29.22 CN2.1 ; CN2.1 58.48,30.5 ; CN2.1 57.2,31.78
  3-IN w0.6: J12.3 52.5,21.08 ; J12.3 51.02,18.6 ; J12.3 53.98,18.6 ; J12.3 52.5,16.12 ; 53.75,38.25 J13.2 ; J13.2 55.65,38.25 ; J13.2 55.65,40.15 ; J13.2 53.75,40.15 ; 46.52,23.4 J12.2 ; J12.2 49,21.92 ; J12.2 49,24.88 ; J12.2 51.48,23.4 ; 57.2,29.22 CN2.1 ; CN2.1 57.2,31.78 ; CN2.1 58.48,30.5
  5-PWR w0.6: J13.2 55.65,38.25 ; J13.2 53.75,40.15 ; J13.2 55.65,40.15 ; J13.2 53.75,38.25 ; J12.2 51.48,23.4 ; J12.2 46.52,23.4 ; J12.2 49,24.88 ; J12.2 49,21.92 ; 57.2,29.22 CN2.1 ; CN2.1 58.48,30.5 ; CN2.1 57.2,31.78 ; 52.5,16.12 J12.3 ; J12.3 51.02,18.6 ; J12.3 53.98,18.6 ; J12.3 52.5,21.08
  10-PWR w0.6: J13.2 55.65,38.25 ; J13.2 55.65,40.15 ; J13.2 53.75,38.25 ; J13.2 53.75,40.15 ; CN2.1 58.48,30.5 ; CN2.1 57.2,29.22 ; CN2.1 57.2,31.78 ; J12.2 49,24.88 ; J12.2 51.48,23.4 ; J12.2 49,21.92 ; J12.2 46.52,23.4 ; 51.02,18.6 J12.3 ; J12.3 52.5,21.08 ; J12.3 52.5,16.12 ; J12.3 53.98,18.6
  12-IN w0.6: CN2.1 57.2,31.78 ; CN2.1 57.2,29.22 ; CN2.1 58.48,30.5 ; J13.2 55.65,38.25 ; J13.2 53.75,40.15 ; J13.2 55.65,40.15 ; J13.2 53.75,38.25 ; 52.5,16.12 J12.3 ; J12.3 52.5,21.08 ; J12.3 51.02,18.6 ; J12.3 53.98,18.6 ; 46.52,23.4 J12.2 ; J12.2 51.48,23.4 ; J12.2 49,24.88 ; J12.2 49,21.92
  13-GND w0.6: J12.2 49,24.88 ; J12.2 49,21.92 ; J12.2 46.52,23.4 ; J12.2 51.48,23.4 ; 53.75,40.15 J13.2 ; J13.2 55.65,40.15 ; J13.2 55.65,38.25 ; J13.2 53.75,38.25 ; J12.3 52.5,21.08 ; J12.3 53.98,18.6 ; J12.3 51.02,18.6 ; J12.3 52.5,16.12 ; CN2.1 57.2,31.78 ; CN2.1 58.48,30.5 ; CN2.1 57.2,29.22
  BOTTOM w0.3: 57.73,104.69 MH2.4 ; MH2.4 57.15,105.27 ; MH2.4 58.31,105.27 ; MH2.4 57.73,105.85 ; MH1.8 2.27,109.31 ; MH1.8 1.69,108.73 ; MH1.8 2.27,108.15 ; MH1.8 2.85,108.73 ; MH1.6 2.85,105.27 ; MH1.6 2.27,104.69 ; MH1.6 2.27,105.85 ; MH1.6 1.69,105.27 ; 5.15,108.73 MH1.2 ; MH1.2 5.73,108.15 ; MH1.2 6.31,108.73 ; MH1.2 5.73,109.31 ; C738.2 15.05,33.11 ; C738.2 14.4,32.4 ; C738.2 15.71,32.4 ; C738.2 15.05,31.69 ; MH1.3 6.45,107.58 ; MH1.3 6.45,106.42 ; MH1.3 7.03,107 ; 58.45,106.42 MH2.3 ; MH2.3 58.45,107.58 ; MH2.3 59.03,107 ; R62.1 18.61,75.8 ; R62.1 17.3,75.8 ; R62.1 17.95,75.09 ; R62.1 17.95,76.51 ; C741.2 24.85,37.07 ; C741.2 24.85,35.65 ; C741.2 25.51,36.36 ; MH1.1 4,110.03 ; MH1.1 4.58,109.45 ; MH1.1 3.42,109.45 ; MH2.8 54.27,109.31 ; MH2.8 53.69,108.73 ; MH2.8 54.27,108.15 ; MH2.8 54.85,108.73 ; 12.85,29.39 U73.5 12.85,31.31 ; MH2.6 54.85,105.27 ; MH2.6 54.27,104.69 ; MH2.6 54.27,105.85 ; MH2.6 53.69,105.27 ; 57.73,108.15 MH2.2 ; MH2.2 57.15,108.73 ; MH2.2 58.31,108.73 ; MH2.2 57.73,109.31 ; 53.55,106.42 MH2.7 ; MH2.7 52.97,107 ; MH2.7 53.55,107.58 ; 55.42,104.55 MH2.5 ; MH2.5 56,103.97 ; MH2.5 56.58,104.55 ; 24.85,39.46 C742.2 ; C742.2 24.85,40.88 ; C742.2 25.51,40.17 ; C742.2 24.2,40.17 ; 24.85,19.75 C735.2 ; C735.2 24.85,21.17 ; C735.2 25.51,20.46 ; C735.2 24.2,20.46 ; 24.85,23.56 C736.2 ; C736.2 24.2,24.27 ; C736.2 25.51,24.27 ; C736.2 24.85,24.98 ; 5.73,104.69 MH1.4 ; MH1.4 5.73,105.85 ; MH1.4 6.31,105.27 ; MH1.4 5.15,105.27 ; 26.85,104.69 R61.2 ; R61.2 26.2,105.4 ; R61.2 26.85,106.11 ; R61.2 27.51,105.4 ; 26.2,75.8 R63.2 ; R63.2 26.85,75.09 ; R63.2 26.85,76.51 ; R63.2 27.51,75.8 ; 0.97,107 MH1.7 ; MH1.7 1.55,107.58 ; MH1.7 1.55,106.42 ; MH2.1 56,110.03 ; MH2.1 55.42,109.45 ; MH2.1 56.58,109.45 ; 10.25,29.39 U73.1 ; U73.1 10.25,31.31 ; U73.1 9.77,30.35 ; R60.2 17.95,106.11 ; R60.2 17.29,105.4 ; R60.2 18.6,105.4 ; R60.2 17.95,104.69 ; 9,22.3 R446.1 9.65,21.59 ; 4,103.97 MH1.5 ; MH1.5 4.58,104.55 ; MH1.5 3.42,104.55
  BOTTOM w0.6: 53.75,38.25 J13.2 ; J13.2 55.65,38.25 ; J13.2 55.65,40.15 ; J13.2 53.75,40.15 ; CN2.1 58.48,30.5 ; CN2.1 57.2,29.22 ; CN2.1 57.2,31.78 ; 52.5,16.12 J12.3 ; J12.3 53.98,18.6 ; J12.3 52.5,21.08 ; J12.3 51.02,18.6 ; J12.2 51.48,23.4 ; J12.2 49,21.92 ; J12.2 46.52,23.4 ; J12.2 49,24.88
  vias: v1(1,103) v1(1,100) v1(1,97) v1(1,94) v1(1,91) v1(1,88) v1(1,85) v1(1,82) v1(1,79) v1(1,76) v1(1,73) v1(1,70) v1(1,67) v1(1,64) v1(1,61) v1(1,58) v1(1,55) v1(1,52) v1(1,49) v1(1,46) v1(1,43) v1(1,40) v1(1,37) v1(1,34) v1(1,31) v1(1,28) v1(1,25) v1(1,22) v1(1,19) v1(1,16) v1(1,13) v1(1,10) v1(1,7) v1(1,4) v1(1,1) v1(2.5,101.5) v1(2.5,98.5) v1(4,13) v1(4,10) v1(4,7) v1(4,4) v1(4,1) v1(4.5,100.5) v1(6.5,88.5) v1(6.5,85.5) v1(6.5,82.5) v1(6.5,79.5) v1(6.5,76.5) v1(6.5,74) v1(7,10) v1(7,7) v1(7,4) v1(7,1) v1(7.5,110) v1(8,105.5) v1(9,107) v1(9,91) v1(9,88.5) v1(9,85.5) v1(9,82.5) v1(9,79.5) v1(9,76.5) v1(9,74) v1(10,7) v1(10,4) v1(10,1) v1(10.5,110) v1(11,105.5) v1(11.6,1.8) v1(11.6,0.8) v1(12,107) v1(12.8,1.8) v1(12.8,0.8) v1(13.5,110) v1(14.78,92.07) v1(14.78,91.17) v1(14.78,89.9) v1(14.78,88.63) v1(14.78,87.83) v1(14.78,62.47) v1(14.78,61.57) v1(14.78,60.3) v1(14.78,59.03) v1(14.78,58.23) v1(15,107) v1(15,50) v1(15,47.5) v1(15.5,78) v1(16,49) v1(16.05,92.07) v1(16.05,91.17) v1(16.05,89.9) v1(16.05,88.63) v1(16.05,87.83) v1(16.05,62.47) v1(16.05,61.57) v1(16.05,60.3) v1(16.05,59.03) v1(16.05,58.23) v1(16.5,110) v1(17.1,88.6) v1(17.1,59) v1(17.32,92.07) v1(17.32,91.17) v1(17.32,89.9) v1(17.32,62.47) v1(17.32,61.57) v1(17.32,60.3) v1(17.5,47.5) v1(17.95,0.8) v1(18,107) v1(18.5,78) v1(18.5,48.5) v1(18.59,92.07) v1(18.59,91.17) v1(18.59,89.9) v1(18.59,62.47) v1(18.59,61.57) v1(18.59,60.3) v1(18.8,88.6) v1(18.8,59) v1(19.06,97.52) v1(19.06,96.25) v1(19.06,94.98) v1(19.06,93.71) v1(19.06,67.92) v1(19.06,66.65) v1(19.06,65.38) v1(19.06,64.11) v1(19.15,0.8) v1(19.4,103) v1(19.4,102) v1(19.4,101) v1(19.4,73.4) v1(19.4,72.4) v1(19.4,71.4) v1(19.5,110) v1(19.6,88.6) v1(19.6,59) v1(19.86,97.52) v1(19.86,96.25) v1(19.86,94.98) v1(19.86,93.71) v1(19.86,92.44) v1(19.86,91.17) v1(19.86,89.9) v1(19.86,67.92) v1(19.86,66.65) v1(19.86,65.38) v1(19.86,64.11) v1(19.86,62.84) v1(19.86,61.57) v1(19.86,60.3) v1(20,47.5) v1(21,107) v1(21,48.5) v1(21.13,97.52) v1(21.13,96.25) v1(21.13,94.98) v1(21.13,93.71) v1(21.13,92.44) v1(21.13,91.17) v1(21.13,89.9) v1(21.13,67.92) v1(21.13,66.65) v1(21.13,65.38) v1(21.13,64.11) v1(21.13,62.84) v1(21.13,61.57) v1(21.13,60.3) v1(21.4,88.6) v1(21.4,87.33) v1(21.4,59) v1(21.4,57.73) v1(21.5,78) v1(21.5,75) v1(21.5,45.5) v1(22,76.5) v1(22.4,103) v1(22.4,102) v1(22.4,101) v1(22.4,97.52) v1(22.4,96.25) v1(22.4,94.98) v1(22.4,93.71) v1(22.4,92.44) v1(22.4,88.63) v1(22.4,87.36) v1(22.4,86.36) v1(22.4,73.4) v1(22.4,72.4) v1(22.4,71.4) v1(22.4,67.92) v1(22.4,66.65) v1(22.4,65.38) v1(22.4,64.11) v1(22.4,62.84) v1(22.4,59.03) v1(22.4,57.76) v1(22.4,56.76) v1(22.5,110) v1(22.5,105.5) v1(22.5,49) v1(22.5,47.5) v1(22.5,44) v1(23,75) v1(23.4,88.6) v1(23.4,87.33) v1(23.4,59) v1(23.4,57.73) v1(23.5,76.5) v1(23.5,46) v1(23.67,97.52) v1(23.67,96.25) v1(23.67,94.98) v1(23.67,93.71) v1(23.67,92.44) v1(23.67,67.92) v1(23.67,66.65) v1(23.67,65.38) v1(23.67,64.11) v1(23.67,62.84) v1(24,107) v1(24.3,1.8) v1(24.3,0.8) v1(24.5,78) v1(24.5,47.5) v1(24.94,97.52) v1(24.94,96.25) v1(24.94,94.98) v1(24.94,93.71) v1(24.94,92.44) v1(24.94,91.17) v1(24.94,89.9) v1(24.94,67.92) v1(24.94,66.65) v1(24.94,65.38) v1(24.94,64.11) v1(24.94,62.84) v1(24.94,61.57) v1(24.94,60.3) v1(25.1,88.7) v1(25.1,87.45) v1(25.1,59.1) v1(25.1,57.85) v1(25.4,103) v1(25.4,102) v1(25.4,101) v1(25.4,73.4) v1(25.4,72.4) v1(25.4,71.4) v1(25.5,110) v1(25.5,43.5) v1(25.5,41.5) v1(25.5,38.5) v1(25.5,35) v1(25.5,1.8) v1(25.5,0.8) v1(25.74,97.52) v1(25.74,96.25) v1(25.74,94.98) v1(25.74,93.71) v1(25.74,67.92) v1(25.74,66.65) v1(25.74,65.38) v1(25.74,64.11) v1(26,88.7) v1(26,59.1) v1(26.21,92.07) v1(26.21,91.17) v1(26.21,89.9) v1(26.21,62.47) v1(26.21,61.57) v1(26.21,60.3) v1(26.5,40) v1(26.5,36.5) v1(26.9,12.2) v1(26.9,11.2) v1(27,107) v1(27.48,92.07) v1(27.48,91.17) v1(27.48,89.9) v1(27.48,62.47) v1(27.48,61.57) v1(27.48,60.3) v1(27.5,41.5) v1(27.5,38.5) v1(27.5,35) v1(27.7,88.7) v1(27.7,59.1) v1(28.1,12.2) v1(28.1,11.2) v1(28.5,110) v1(28.75,92.07) v1(28.75,91.17) v1(28.75,89.9) v1(28.75,88.63) v1(28.75,87.83) v1(28.75,62.47) v1(28.75,61.57) v1(28.75,60.3) v1(28.75,59.03) v1(28.75,58.23) v1(30,107) v1(30.02,92.07) v1(30.02,91.17) v1(30.02,89.9) v1(30.02,88.63) v1(30.02,62.47) v1(30.02,61.57) v1(30.02,60.3) v1(30.02,59.03) v1(30.65,1.8) v1(30.65,0.8) v1(31.5,110) v1(31.5,24) v1(31.85,1.8) v1(31.85,0.8) v1(32.5,28) v1(32.7,89.6) v1(32.7,87.9) v1(32.7,60) v1(32.7,58.3) v1(33,106) v1(33.3,89.6) v1(33.3,87.9) v1(33.3,60) v1(33.3,58.3) v1(33.9,89.6) v1(33.9,87.9) v1(33.9,60) v1(33.9,58.3) v1(34,32) v1(34,29) v1(34,26) v1(34,23) v1(34,20) v1(34.5,110) v1(36,106) v1(36,103) v1(36,100) v1(37,1.8) v1(37,0.8) v1(37.5,110) v1(37.5,98) v1(38.2,1.8) v1(38.2,0.8) v1(39,106) v1(39,103) v1(39,100) v1(40.5,110) v1(42,106) v1(42,103) v1(42,100) v1(43.5,110) v1(45,106) v1(45,103) v1(45,100) v1(46,40) v1(46,37) v1(46,34) v1(46.5,110) v1(46.5,46) v1(46.5,44.5) v1(47.49,93.7) v1(47.49,92.43) v1(47.49,91.16) v1(47.49,89.89) v1(47.49,88.62) v1(47.49,74.8) v1(47.49,73.53) v1(47.49,72.26) v1(48,106) v1(48,103) v1(48,100) v1(48,14) v1(48.7,46.2) v1(48.7,45.4) v1(48.77,93.7) v1(48.77,92.43) v1(48.77,91.16) v1(48.77,89.89) v1(48.77,88.62) v1(48.77,74.8) v1(48.77,73.53) v1(48.77,72.26) v1(49.5,110) v1(49.5,46.2) v1(49.5,45.4) v1(50.03,97.51) v1(50.03,96.24) v1(50.03,94.97) v1(50.03,93.7) v1(50.03,92.43) v1(50.03,91.16) v1(50.03,78.61) v1(50.03,77.34) v1(50.03,76.07) v1(50.03,74.8) v1(50.03,73.53) v1(50.03,72.26) v1(50.03,70.99) v1(50.03,69.72) v1(50,7) v1(50,4) v1(50,1) v1(50.3,46.2) v1(50.3,45.4) v1(50.5,64.5) v1(50.5,60.5) v1(50.5,14) v1(51,106) v1(51,103) v1(51,100) v1(51.3,97.51) v1(51.3,96.24) v1(51.3,92.43) v1(51.3,91.16) v1(51.3,78.61) v1(51.3,77.34) v1(51.3,73.53) v1(51.3,72.26) v1(51.3,70.99) v1(51.3,69.72) v1(51.5,66.5) v1(52.5,110) v1(52.5,58.5) v1(53,14) v1(53,7) v1(53,4) v1(53,1) v1(53.5,101.5) v1(53.5,60.5) v1(54,70) v1(54,67) v1(54,37) v1(54,34) v1(55,58) v1(56,101.5) v1(56,98.5) v1(56,95.5) v1(56,92.5) v1(56,89.5) v1(56,86.5) v1(56,83.5) v1(56,80.5) v1(56,77.5) v1(56,74.5) v1(56,71.5) v1(56,68.5) v1(56,65.5) v1(56,62.5) v1(56,59.5) v1(56,10) v1(56,7) v1(56,4) v1(56,1) v1(56.5,56.5) v1(57.5,53.5) v1(59,103) v1(59,100) v1(59,97) v1(59,94) v1(59,91) v1(59,88) v1(59,85) v1(59,82) v1(59,79) v1(59,76) v1(59,73) v1(59,70) v1(59,67) v1(59,64) v1(59,61) v1(59,58) v1(59,55) v1(59,52) v1(59,49) v1(59,46) v1(59,43) v1(59,40) v1(59,37) v1(59,34) v1(59,31) v1(59,28) v1(59,25) v1(59,22) v1(59,19) v1(59,16) v1(59,13) v1(59,10) v1(59,7) v1(59,4) v1(59,1)
+A1P8:
  vias: v1(6.8,72.1) v1(6.8,71.5) v1(6.8,70.9) v1(7.4,72.1) v1(7.4,71.5) v1(7.4,70.9) v1(9,72.1) v1(9,71.5) v1(9,70.9) v1(36.35,12.3) v1(36.35,11.7) v1(36.35,11.1) v1(36.95,12.3) v1(36.95,11.7) v1(36.95,11.1) v1(37.55,12.3) v1(37.55,11.7) v1(37.55,11.1)
+A1P9:
  vias: v1(30,12.3) v1(30,11.7) v1(30,11.1) v1(30.6,12.3) v1(30.6,11.7) v1(30.6,11.1) v1(31.2,12.3) v1(31.2,11.7) v1(31.2,11.1) v1(35.4,95.6) v1(35.4,95) v1(35.4,94.4) v1(37,95.6) v1(37,95) v1(37,94.4) v1(37.6,95.6) v1(37.6,95) v1(37.6,94.4)
+A3P3: length 7.9
  BOTTOM w0.3: v1(13.5,28.9) U73.6 13.5,32.35 C738.1 ; v1(12.5,26.5) 12.2,26.2 U73.11 12.2,22.55 R463.2
  vias: v1(6.8,101.7) v1(6.8,101.1) v1(6.8,100.5) v1(7.4,101.7) v1(7.4,101.1) v1(7.4,100.5) v1(9,101.7) v1(9,101.1) v1(9,100.5) v1(23.65,12.3) v1(23.65,11.7) v1(23.65,11.1) v1(24.25,12.3) v1(24.25,11.7) v1(24.25,11.1) v1(24.85,12.3) v1(24.85,11.7) v1(24.85,11.1)
+A12P:
  vias: v1(20.5,30.3) v1(20.5,29.6) v1(21.2,30.3) v1(21.2,29.6) v1(27,16.3) v1(27,15.6) v1(27.7,16.3) v1(27.7,15.6) v1(46.4,81.5) v1(46.4,80.8) v1(47.1,81.5) v1(47.1,80.8)
+D1P2:
  vias: v1(35.4,68) v1(35.4,67.4) v1(35.4,66.8) v1(37,68) v1(37,67.4) v1(37,66.8) v1(37.6,68) v1(37.6,67.4) v1(37.6,66.8) v1(43.35,2.3) v1(43.35,1.7) v1(43.35,1.1)
+D1P2_FPGA:
  vias: v1(35.4,65.1) v1(35.4,64.5) v1(35.4,63.9) v1(37,65.1) v1(37,64.5) v1(37,63.9) v1(37.6,65.1) v1(37.6,64.5) v1(37.6,63.9) v1(40.2,2.3) v1(40.2,1.7) v1(40.2,1.1) v1(40.8,2.3) v1(40.8,1.7) v1(40.8,1.1) v1(41.4,2.3) v1(41.4,1.7) v1(41.4,1.1)
+D1P8:
  vias: v1(6.8,65.3) v1(6.8,64.7) v1(6.8,64.1) v1(7.4,65.3) v1(7.4,64.7) v1(7.4,64.1) v1(9,65.3) v1(9,64.7) v1(9,64.1) v1(33.85,2.3) v1(33.85,1.7) v1(33.85,1.1) v1(34.45,2.3) v1(34.45,1.7) v1(34.45,1.1) v1(35.05,2.3) v1(35.05,1.7) v1(35.05,1.1)
+D1P8_FPGA:
  vias: v1(6.8,68.7) v1(6.8,68.1) v1(6.8,67.5) v1(7.4,68.7) v1(7.4,68.1) v1(7.4,67.5) v1(9,68.7) v1(9,68.1) v1(9,67.5) v1(27.5,2.3) v1(27.5,1.7) v1(27.5,1.1) v1(28.1,2.3) v1(28.1,1.7) v1(28.1,1.1) v1(28.7,2.3) v1(28.7,1.7) v1(28.7,1.1)
+D3P3:
  vias: v1(6.8,94.9) v1(6.8,94.3) v1(6.8,93.7) v1(7.4,94.9) v1(7.4,94.3) v1(7.4,93.7) v1(9,94.9) v1(9,94.3) v1(9,93.7) v1(21.15,2.3) v1(21.15,1.7) v1(21.15,1.1) v1(21.75,2.3) v1(21.75,1.7) v1(21.75,1.1) v1(22.35,2.3) v1(22.35,1.7) v1(22.35,1.1)
+D3P3_FPGA:
  vias: v1(6.8,98.3) v1(6.8,97.7) v1(6.8,97.1) v1(7.4,98.3) v1(7.4,97.7) v1(7.4,97.1) v1(9,98.3) v1(9,97.7) v1(9,97.1) v1(14.8,2.3) v1(14.8,1.7) v1(14.8,1.1) v1(15.4,2.3) v1(15.4,1.7) v1(15.4,1.1) v1(16,2.3) v1(16,1.7) v1(16,1.1)
-A3P3:
  vias: v1(42.06,12.3) v1(42.06,11.7) v1(42.06,11.1) v1(42.8,59.2) v1(42.8,58.5) v1(43.5,59.2) v1(43.5,58.5) v1(44.1,59.2) v1(44.1,58.5)
BATT_+A7P4: length 3.5
  TOP w0.2: 51.3,48.4 51.2,48.3 ; 51.2,48.3 51,48.3 ; 51.2,48.3 51.3,48.2 ; 51.2,48.3 51.4,48.3 ; 51,48.3 50.2,48.3 49.73,47.83 U20.9 ; 51,48.3 51.3,48 ; 51,48.3 51.3,48.6
  vias: v1(32.7,80.1) v1(32.7,78.4) v1(32.7,77.8) v1(32.7,50.5) v1(32.7,48.8) v1(32.7,48.2) v1(33.3,80.1) v1(33.3,78.4) v1(33.3,77.8) v1(33.3,50.5) v1(33.3,48.8) v1(33.3,48.2) v1(33.9,80.1) v1(33.9,78.4) v1(33.9,77.8) v1(33.9,50.5) v1(33.9,48.8) v1(33.9,48.2) v1(41.3,92.2) v1(41.3,91.5) v1(41.3,73.3) v1(41.3,72.6) v1(42,92.2) v1(42,91.5) v1(42,73.3) v1(42,72.6) v1(42.7,92.2) v1(42.7,91.5) v1(42.7,73.3) v1(42.7,72.6) v1(54,49.2) v1(54,48.6) v1(54.6,49.2) v1(54.6,48.6) v1(55.2,49.2) v1(55.2,48.6)
BATT_LEVEL: length 5.8
  TOP w0.5: R385.2 57.25,45.9 57.35,45.9 ; R385.2 57.15,46.45 v1(57.7,45.9) ; R385.2 R388.1 ; R388.1 57.35,45.9 ; R388.1 57.05,45.25 v1(57.7,45.9) ; 57.35,45.9 v1(57.7,45.9)
  vias: v1(47.15,12.3) v1(47.15,11.7) v1(47.15,11.1)
HPC: length 2.2
  TOP w0.5: U72.14 31.36,26.81 C739.1
HPFB: length 3.6
  TOP w0.5: v1(15.2,31.1) 14.85,31.45 Q2.2 14.1,29.95 R461.1 ; R462.1 v1(32.8,40.6)
HVN_VAR:
  vias: v1(6.5,29.4) v1(6.5,28.8) v1(7.1,29.4) v1(7.1,28.8) v1(7.7,29.4) v1(7.7,28.8) v1(16.7,11.7) v1(16.7,11.1) v1(17.3,11.7) v1(17.3,11.1) v1(17.9,11.7) v1(17.9,11.1)
PM_A1: length 4
  TOP w0.5: v1(9.8,23.5) 8.4,23.5 7.6,22.7 R442.1
  BOTTOM w0.3: U73.14 10.25,23.75 10,23.5 v1(9.8,23.5)
PM_A2: length 13.1
  TOP w0.5: R458.1 v1(19,31.6)
  BOTTOM w0.3: v1(19,31.6) 19,30.4 16.3,27.7 12,27.7 10.9,28.8 U73.2
PM_B1: length 4.2
  BOTTOM w0.3: U73.12 11.55,22.7 R446.2 10.9,22.55 U73.13
PM_B2: length 5.7
  TOP w0.5: v1(11.9,31.3) 12.6,32 Q1.3 12.6,32.9 13.05,33.35 Q2.1
  BOTTOM w0.3: U73.4 12.2,31 v1(11.9,31.3) 11.55,30.95 U73.3
PM_CLK: length 3.5
  TOP w0.5: J17.55 v1(45.88,11.1)
  BOTTOM w0.3: U73.9 v1(13.5,26)
PM_CS: length 3.4
  TOP w0.5: J17.56 v1(45.88,2.2)
  BOTTOM w0.3: v1(14.7,28.9) 14.15,29.45 U73.7
PM_SDI: length 4.3
  TOP w0.5: J17.58 v1(47.15,2.2)
  BOTTOM w0.3: v1(14.7,26) 14.15,25.45 U73.8
N16801980: length 0.8
  BOTTOM w0.5: C735.1 v1(22.6,20.46)
N16801995: length 2.2
  TOP w0.5: U72.8 28.94,19.19 28.65,18.9 R443.1
N16801998: length 1.3
  TOP w0.5: R443.2 R447.2
N16802036: length 3
  TOP w0.5: R444.1 23.85,28.05 24.4,27.5 24.4,27.1 24.11,26.81 U72.1
N16802052: length 2.2
  TOP w0.5: U72.10 31.38,21.73 C734.1
N16802946: length 2.2
  TOP w0.5: U72.7 24.06,19.19 24.35,18.9 R447.1
N16803110: length 1.3
  TOP w0.5: R444.2 R448.1
N16805912: length 2.2
  TOP w0.5: U74.8 28.94,35.09 28.65,34.8 R450.1
N16805914: length 1.3
  TOP w0.5: R450.2 R454.2
N16805918: length 3
  TOP w0.5: R451.1 23.85,43.95 24.4,43.4 24.4,43 24.11,42.71 U74.1
N16805928: length 2.2
  TOP w0.5: U74.10 31.38,37.63 C740.1
N16805964:
  vias: v1(18.4,35) v1(18.4,34.4) v1(19,35) v1(19,34.4)
N16806049: length 2.2
  TOP w0.5: R454.1 24.35,34.8 24.06,35.09 U74.7
N16806059: length 1.3
  TOP w0.5: R451.2 R455.1
N16807604: length 2.2
  TOP w0.5: C739.2 31.41,25.54 U72.13
N16807701: length 3.5
  TOP w0.5: R462.2 C744.1 31.36,42.71 U74.14
N16807711: length 2.2
  TOP w0.5: C744.2 31.41,41.44 U74.13
N16807961: length 3.2
  TOP w0.5: R445.2 v1(22.6,24.27) U72.3
  BOTTOM w0.5: v1(22.6,24.27) C736.1
N16808575: length 3.2
  TOP w0.5: U74.3 v1(22.6,40.17) R452.2
  BOTTOM w0.5: v1(22.6,40.17) C742.1
N16808930: length 3.6
  TOP w0.5: U74.4 22.6,38.9 v1(21.9,38.2) M2.1
  BOTTOM w0.5: M1.1 21.85,38.25 v1(21.9,38.2)
N16809022: length 1.2
  TOP w0.5: M2.3 19.4,36.2 v1(19.1,36.5)
N16809213:
  vias: v1(12.6,38.4) v1(12.6,37.8) v1(13.2,38.4) v1(13.2,37.8)
N16810100: length 1.5
  TOP w0.5: R459.1 Q1.2
N16810522: length 1.7
  TOP w0.5: Q2.3 17.55,32.4 R460.1
N16841635:
  vias: v1(14.78,86.89) v1(14.78,86.09) v1(14.78,84.82) v1(14.78,83.55) v1(14.78,82.28) v1(16.05,86.89) v1(16.05,86.09) v1(16.05,84.82) v1(16.05,83.55) v1(16.05,82.28) v1(17.32,86.89) v1(17.32,86.09) v1(17.32,84.82) v1(17.32,83.55) v1(17.32,82.28) v1(18.3,86.1) v1(18.59,84.82) v1(18.59,83.55) v1(18.59,82.28) v1(19.6,84.8) v1(19.86,83.55) v1(19.86,82.28) v1(21.13,83.18) v1(21.13,82.28) v1(22.4,83.18) v1(22.4,82.28) v1(23.67,83.18) v1(23.67,82.28) v1(24.94,83.55) v1(24.94,82.28) v1(25.2,84.8) v1(26.21,84.82) v1(26.21,83.55) v1(26.21,82.28) v1(26.5,86.1) v1(27.48,86.99) v1(27.48,86.09) v1(27.48,84.82) v1(27.48,83.55) v1(27.48,82.28) v1(28.75,86.99) v1(28.75,86.09) v1(28.75,84.82) v1(28.75,83.55) v1(28.75,82.28) v1(30.02,86.09) v1(30.02,84.82) v1(30.02,83.55) v1(30.02,82.28) v1(32.7,86.5) v1(32.7,84.8) v1(32.7,83.2) v1(32.7,81.5) v1(33.3,86.5) v1(33.3,84.8) v1(33.3,83.2) v1(33.3,81.5) v1(33.9,86.5) v1(33.9,84.8) v1(33.9,83.2) v1(33.9,81.5)
N16842686:
  vias: v1(10.5,101.7) v1(10.5,101.1) v1(10.5,100.5) v1(10.5,98.3) v1(10.5,97.7) v1(10.5,97.1) v1(10.5,94.9) v1(10.5,94.3) v1(10.5,93.7) v1(12.2,101.7) v1(12.2,101.1) v1(12.2,100.5) v1(12.2,98.3) v1(12.2,97.7) v1(12.2,97.1) v1(12.2,94.9) v1(12.2,94.3) v1(12.2,93.7) v1(12.9,103) v1(12.9,102) v1(12.9,101) v1(14.78,97.52) v1(14.78,96.25) v1(14.78,94.98) v1(14.78,93.71) v1(14.78,92.91) v1(15.8,103) v1(15.8,102) v1(15.8,101) v1(16.05,97.52) v1(16.05,96.25) v1(16.05,94.98) v1(16.05,93.71) v1(16.05,92.91) v1(17.32,97.52) v1(17.32,97.52) v1(17.32,96.25) v1(17.32,96.25) v1(17.32,94.98) v1(17.32,94.98) v1(17.32,93.71) v1(17.32,93.71) v1(17.32,92.91) v1(17.32,92.91) v1(18.12,97.52) v1(18.12,97.52) v1(18.12,96.25) v1(18.12,96.25) v1(18.12,94.98) v1(18.12,94.98) v1(18.12,93.71) v1(18.12,93.71)
N16847545:
  vias: v1(26.68,97.52) v1(26.68,96.25) v1(26.68,94.98) v1(26.68,93.71) v1(27.48,97.52) v1(27.48,96.25) v1(27.48,94.98) v1(27.48,93.71) v1(27.48,92.91) v1(28.75,97.52) v1(28.75,96.25) v1(28.75,94.98) v1(28.75,93.71) v1(28.75,92.91) v1(29,103) v1(29,102) v1(29,101) v1(30.02,97.52) v1(30.02,96.25) v1(30.02,94.98) v1(30.02,93.71) v1(30.02,92.91) v1(31.9,103) v1(31.9,102) v1(31.9,101) v1(32.2,95.6) v1(32.2,95) v1(32.2,94.4) v1(33.9,95.6) v1(33.9,95) v1(33.9,94.4)
N16847845: length 21.9
  TOP w0.3: U14.K7 v1(21.13,86.09) ; C70.2 v1(20.1,105.4)
  BOTTOM w0.2: v1(20.1,105.4) 20.5,105 20.5,86.72 v1(21.13,86.09)
  BOTTOM w0.3: v1(20.1,105.4) C70.2
N16849687: length 21.9
  TOP w0.3: U14.K6 v1(23.67,86.09) ; v1(24.7,105.4) C71.2
  BOTTOM w0.2: v1(23.67,86.09) 24.3,86.72 24.3,105 v1(24.7,105.4)
  BOTTOM w0.3: C71.2 v1(24.7,105.4)
N16851516: length 9.2
  TOP w0.3: TP1.1 v1(17.7,80.1) ; U14.H10 v1(18.59,87.36)
  BOTTOM w0.127: v1(18.59,87.36) 17.81,86.58 17.81,80.21 v1(17.7,80.1)
N16851519: length 9.2
  TOP w0.3: TP2.1 v1(27.1,80.1) ; U14.H3 v1(26.21,87.36)
  BOTTOM w0.127: v1(26.21,87.36) 27.01,86.56 27.01,80.19 v1(27.1,80.1)
N16851598: length 8.5
  TOP w0.3: 20.5,86.72 v1(19.86,86.09) ; U14.F6 v1(22.4,89.9)
  BOTTOM w0.127: v1(19.86,86.09) 20.5,85.45 21.55,85.45 21.9,85.8 21.9,89.4 v1(22.4,89.9)
N16851915: length 8
  TOP w0.3: TP3.1 v1(25.9,80.1) ; 25.57,86.72 v1(24.94,86.09)
  BOTTOM w0.127: v1(25.9,80.1) 25.7,80.3 25.7,85.33 v1(24.94,86.09)
N16851929: length 9.3
  TOP w0.3: 20.5,88 v1(19.86,87.36) ; TP4.1 v1(18.9,80.1)
  BOTTOM w0.127: v1(18.9,80.1) 19.11,80.31 19.11,86.61 v1(19.86,87.36)
N16851988: length 6.7
  TOP w0.3: C72.1 v1(20.25,80.1) ; 20.5,85.45 v1(21.13,84.82)
  BOTTOM w0.2: v1(21.13,84.82) 20.5,84.19 20.5,80.34 v1(20.25,80.1)
N16851993: length 6.7
  TOP w0.3: C77.1 v1(24.55,80.1) ; U14.K5 v1(23.67,84.82)
  BOTTOM w0.2: v1(24.55,80.1) 24.3,80.34 24.3,84.19 v1(23.67,84.82)
N16854474:
  vias: v1(14.78,57.29) v1(14.78,56.49) v1(14.78,55.22) v1(14.78,53.95) v1(14.78,52.68) v1(16.05,57.29) v1(16.05,56.49) v1(16.05,55.22) v1(16.05,53.95) v1(16.05,52.68) v1(17.32,57.29) v1(17.32,56.49) v1(17.32,55.22) v1(17.32,53.95) v1(17.32,52.68) v1(18.3,56.5) v1(18.59,55.22) v1(18.59,53.95) v1(18.59,52.68) v1(19.6,55.2) v1(19.86,53.95) v1(19.86,52.68) v1(21.13,53.58) v1(21.13,52.68) v1(22.4,53.58) v1(22.4,52.68) v1(23.67,53.58) v1(23.67,52.68) v1(24.94,53.95) v1(24.94,52.68) v1(25.2,55.2) v1(26.21,55.22) v1(26.21,53.95) v1(26.21,52.68) v1(26.5,56.5) v1(27.48,57.39) v1(27.48,56.49) v1(27.48,55.22) v1(27.48,53.95) v1(27.48,52.68) v1(28.75,57.39) v1(28.75,56.49) v1(28.75,55.22) v1(28.75,53.95) v1(28.75,52.68) v1(30.02,56.49) v1(30.02,55.22) v1(30.02,53.95) v1(30.02,52.68) v1(32.7,56.9) v1(32.7,55.2) v1(32.7,53.6) v1(32.7,51.9) v1(33.3,56.9) v1(33.3,55.2) v1(33.3,53.6) v1(33.3,51.9) v1(33.9,56.9) v1(33.9,55.2) v1(33.9,53.6) v1(33.9,51.9)
N16854644:
  vias: v1(10.5,72.1) v1(10.5,71.5) v1(10.5,70.9) v1(10.5,68.7) v1(10.5,68.1) v1(10.5,67.5) v1(10.5,65.3) v1(10.5,64.7) v1(10.5,64.1) v1(12.2,72.1) v1(12.2,71.5) v1(12.2,70.9) v1(12.2,68.7) v1(12.2,68.1) v1(12.2,67.5) v1(12.2,65.3) v1(12.2,64.7) v1(12.2,64.1) v1(12.9,73.4) v1(12.9,72.4) v1(12.9,71.4) v1(14.78,67.92) v1(14.78,66.65) v1(14.78,65.38) v1(14.78,64.11) v1(14.78,63.31) v1(15.8,73.4) v1(15.8,72.4) v1(15.8,71.4) v1(16.05,67.92) v1(16.05,66.65) v1(16.05,65.38) v1(16.05,64.11) v1(16.05,63.31) v1(17.32,67.92) v1(17.32,67.92) v1(17.32,66.65) v1(17.32,66.65) v1(17.32,65.38) v1(17.32,65.38) v1(17.32,64.11) v1(17.32,64.11) v1(17.32,63.31) v1(17.32,63.31) v1(18.12,67.92) v1(18.12,67.92) v1(18.12,66.65) v1(18.12,66.65) v1(18.12,65.38) v1(18.12,65.38) v1(18.12,64.11) v1(18.12,64.11)
N16855008:
  vias: v1(26.68,67.92) v1(26.68,66.65) v1(26.68,65.38) v1(26.68,64.11) v1(27.48,67.92) v1(27.48,66.65) v1(27.48,65.38) v1(27.48,64.11) v1(27.48,63.31) v1(28.75,67.92) v1(28.75,66.65) v1(28.75,65.38) v1(28.75,64.11) v1(28.75,63.31) v1(29,73.4) v1(29,72.4) v1(29,71.4) v1(30.02,67.92) v1(30.02,66.65) v1(30.02,65.38) v1(30.02,64.11) v1(30.02,63.31) v1(31.9,73.4) v1(31.9,72.4) v1(31.9,71.4) v1(32.2,66) v1(32.2,65.4) v1(32.2,64.8) v1(33.9,66) v1(33.9,65.4) v1(33.9,64.8)
N16855112: length 21.9
  TOP w0.3: C81.2 v1(20.1,75.8) ; U15.K7 v1(21.13,56.49)
  BOTTOM w0.2: v1(21.13,56.49) 20.5,57.12 20.5,75.41 v1(20.1,75.8)
  BOTTOM w0.3: v1(20.1,75.8) C81.2
N16855128: length 21.9
  TOP w0.3: U15.K6 v1(23.67,56.49) ; v1(24.7,75.8) C82.2
  BOTTOM w0.2: v1(23.67,56.49) 24.3,57.12 24.3,75.41 v1(24.7,75.8)
  BOTTOM w0.3: C82.2 v1(24.7,75.8)
N16855306: length 9.2
  TOP w0.3: TP6.1 v1(17.7,50.5) ; 17.95,58.4 v1(18.59,57.76)
  BOTTOM w0.127: v1(18.59,57.76) 17.81,56.98 17.81,50.61 v1(17.7,50.5)
N16855308: length 9.2
  TOP w0.3: TP5.1 v1(27.1,50.5) ; 26.84,58.4 v1(26.21,57.76)
  BOTTOM w0.127: v1(26.21,57.76) 27.01,56.96 27.01,50.59 v1(27.1,50.5)
N16855324: length 8.5
  TOP w0.3: 20.5,57.12 v1(19.86,56.49) ; 23.04,60.94 v1(22.4,60.3)
  BOTTOM w0.127: v1(19.86,56.49) 20.5,55.85 21.55,55.85 21.9,56.2 21.9,59.8 v1(22.4,60.3)
N16855330: length 8
  TOP w0.3: U15.J4 v1(24.94,56.49) ; TP7.1 v1(25.9,50.5)
  BOTTOM w0.127: v1(24.94,56.49) 25.7,55.73 25.7,50.7 v1(25.9,50.5)
N16855339: length 9.3
  TOP w0.3: 20.5,58.4 v1(19.86,57.76) ; TP8.1 v1(18.9,50.5)
  BOTTOM w0.127: v1(19.86,57.76) 19.11,57.01 19.11,50.7 v1(18.9,50.5)
N16855356: length 6.7
  TOP w0.3: C83.1 v1(20.25,50.5) ; 20.5,55.85 v1(21.13,55.22)
  BOTTOM w0.2: v1(20.25,50.5) 20.5,50.74 20.5,54.59 v1(21.13,55.22)
N16855360: length 6.7
  TOP w0.3: C84.1 v1(24.55,50.5) ; U15.K5 v1(23.67,55.22)
  BOTTOM w0.2: v1(24.55,50.5) 24.3,50.74 24.3,54.59 v1(23.67,55.22)
